# EAGLE board simulator (EAGLE 9.7.0)

Size 94.69 x 123.33 mm. Coordinates in mm from the lower left corner, seen from the top.
Outline: 0,0 94.69,0 94.69,123.33 0,123.33 0,0
Copper layers (1*16): Top 0.035mm / dielectric 1.5mm / Bottom 0.035mm
Design rules "default": minimum track width 6mil, minimum drill 0.35mm, track to track 6mil, track to pad 6mil, pad to pad 6mil, via to via 6mil, smd to smd 6mil, copper to edge 40mil, drill to drill 6mil, minimum pad ring 10mil, minimum via ring 8mil, stop-mask expansion 4mil, vias tented up to drill 0mil, thermal gap 10mil

## Footprints (pad centres in the part's own frame; a part is rotated, then mirrored left to right if it is on the bottom)
LEDRD254W60D565H860B = drill 0.981 pad 1.581: 1 -1.27,0; 2 1.27,0
RESAD1016W63L850D250B = drill 0.83 pad 1.43: 1 -5.08,0; 2 5.08,0
ARDUINO-UNO-R3-SHIELD = drill 1.016 pad 1.88: 3.3V 24.13,-2.54; 5V 24.13,0; A0 24.13,12.7; A1 24.13,15.24; A2 24.13,17.78; A3 24.13,20.32; A4 24.13,22.86; A5 24.13,25.4; AREF -24.13,-13.97; D2 -24.13,20.32; D3 -24.13,17.78; D4 -24.13,15.24; D5 -24.13,12.7; D6 -24.13,10.16; D7 -24.13,7.62; D8 -24.13,3.81; D9 -24.13,1.27; D10 -24.13,-1.27; D11 -24.13,-3.81; D12 -24.13,-6.35; D13 -24.13,-8.89; GND@0 24.13,2.54; GND@1 24.13,5.08; GND@2 -24.13,-11.43; IOREF 24.13,-7.62; NC 24.13,-10.16; RES 24.13,-5.08; RX -24.13,25.4; SCL -24.13,-19.05; SDA -24.13,-16.51; TX -24.13,22.86; VIN 24.13,7.62

## Placement (x,y rotation side)
D1  RED  [LEDRD254W60D565H860B]  7.6,7.91 0 top
D2  RED  [LEDRD254W60D565H860B]  15.22,7.91 0 top
D3  RED  [LEDRD254W60D565H860B]  22.84,7.91 0 top
D4  RED  [LEDRD254W60D565H860B]  30.46,7.91 0 top
D5  RED  [LEDRD254W60D565H860B]  38.08,7.91 0 top
R1  330  [RESAD1016W63L850D250B]  6.33,20.61 270 top
R2  330  [RESAD1016W63L850D250B]  13.95,20.61 270 top
R3  330  [RESAD1016W63L850D250B]  21.57,20.61 270 top
R4  330  [RESAD1016W63L850D250B]  29.19,20.61 270 top
R5  330  [RESAD1016W63L850D250B]  36.81,20.61 270 top
U1  ARDUINO-UNO-R3-SHIELD  [ARDUINO-UNO-R3-SHIELD]  60.17,93.49 270 top

## Library data of the parts
D1-D5 = Tinkercad; CATEGORY: Opto-Electronic; SUB-CATEGORY: LED; VALUE: LED_RED
R1-R5 U1 = Tinkercad

## Nets
D1_A: D1.1 R1.2
D2_A: D2.1 R2.2
D3_A: D3.1 R3.2
D4_A: D4.1 R4.2
D5_A: D5.1 R5.2
U1_D2: R1.1 U1.D2
U1_D3: R2.1 U1.D3
U1_D4: R3.1 U1.D4
U1_D5: R4.1 U1.D5
U1_D6: R5.1 U1.D6
U1_GND: D1.2 D2.2 D3.2 D4.2 D5.2 U1.GND@0 U1.GND@1 U1.GND@2

## Tracks (layer width: path | path; a pad name or v marks a point on that pad's centre or on a via)
D1_A  (1 unrouted)
D2_A  (1 unrouted)
D3_A  (1 unrouted)
D4_A  (1 unrouted)
D5_A  (1 unrouted)
U1_D2  (1 unrouted)
U1_D3  (1 unrouted)
U1_D4  (1 unrouted)
U1_D5  (1 unrouted)
U1_D6  (1 unrouted)
U1_GND  (7 unrouted)